# Altium PCB 400797.PcbDoc (part 5 of 8)
Units mm, origin at the board's own origin, x right, y up, seen from the top; angles counter-clockwise.
Board outline 155 x 63.5 mm, 4 copper layers (Top Layer, Mid-Layer 1, Mid-Layer 2, Bottom Layer), stack 1.514 mm thick; 333 components, 292 nets, 1555 pads, 2205 vias.
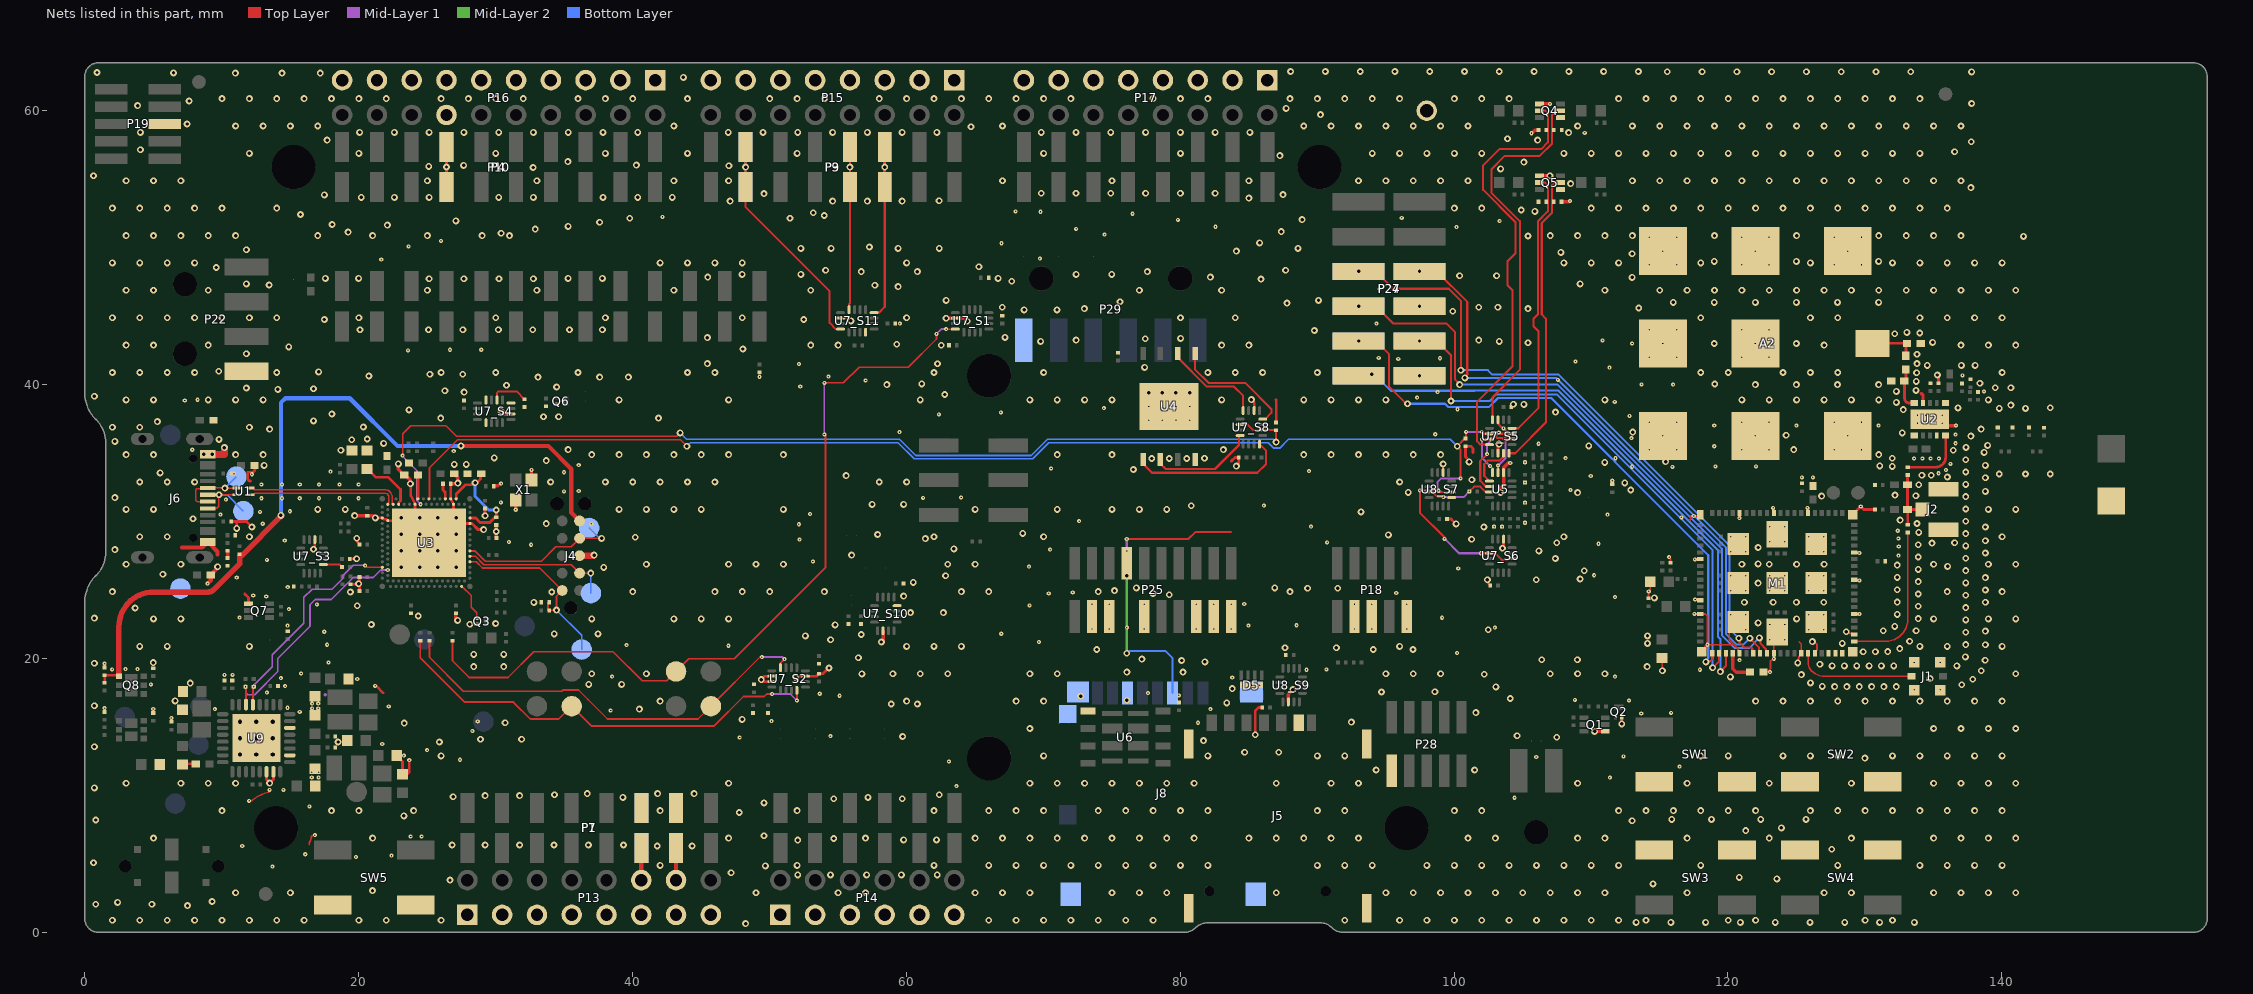
[diagram p5: the nets of this part, all layers, seen from the top]

## Via types
v1: diameter 0.5, hole 0.25, Top Layer to Bottom Layer, tented both sides, 1614 vias
v2: diameter 0.3, hole 0.1, Top Layer to Mid-Layer 1, tented top, 485 vias
v3: diameter 0.3, hole 0.1, Top Layer to Mid-Layer 1, tented both sides, 97 vias
v4: diameter 0.61, hole 0.305, Top Layer to Bottom Layer, tented both sides, 9 vias

## Nets (pads, with @x,y where several pads share a name; then routed paths per layer and width w, separated by ;. In a path a pad name is that pad's centre, name@x,y a point inside that pad or via, vN(x,y) a via of type N, cw(c..) or ccw(c..) an arc to the next point about the centre after c; other vN are vias at no path point) (continued)
COM.CH1_S11: P3.3 P9.3 U7_S11.16 | length 16.1
  Top Layer w0.15: U7_S11.16@57.643,45.25 58,45.25 58.42,45.67 P3.3@58.42,54.416 P3.3@58.42,57.346
  Bottom Layer w0.15: P9.3@58.42,53.824 P9.3@58.42,54.416 v1(58.42,55.881) P9.3@58.42,57.346
COM.CH2_S2: R16.2 TP10.1 U7_S2.4 | length 31.8
  Top Layer w0.125: R16.2@25.175,21.299 25.175,20.088 27.651,17.613 34.83,17.613 34.915,17.698 36.052,17.698 36.748,17.002 36.748,16.999 38.174,15.573 44.782,15.573 TP10.1@45.72,16.51 49.31,20.1 v2(49.45,20.1)
  Top Layer w0.15: U7_S2.4@50.8,19.325 50.8,19.65 v2(51.1,19.95)
  Mid-Layer 1 w0.15: v2(49.45,20.1) 50.95,20.1 v2(51.1,19.95)
COM.CH2_S11: P3.4 P9.4 U7_S11.4 | length 15.4
  Top Layer w0.15: U7_S11.4@55.818,45.475 55.818,45.875 55.881,45.938 P3.4@55.88,54.416 P3.4@55.88,57.346
  Bottom Layer w0.15: P9.4@55.88,53.824 P9.4@55.88,54.416 v1(55.88,55.881) P9.4@55.88,57.346
COM.CH3_S1: R12.2 TP7.1 U7_S1.8 | length 59.3
  Top Layer w0.125: R12.2@26.85,21.299 26.85,19.827 28.065,18.613 30.903,18.613 32.778,20.488 38.573,20.488 40.698,18.363 42.492,18.363 TP7.1@43.18,19.05 44.118,19.988 47.423,19.988 54.1,26.664 54.1,36.263 v2(54.013,36.35) ; v2(54.013,40.125) 55.4,40.125 56.55,41.275 60.15,41.275 62.2,43.325 v2(62.2,43.7) ; v2(62.9,44.052) 62.902,44.05 U7_S1.8@63.575,44.05
  Mid-Layer 1 w0.125: v2(54.013,36.35) v2(54.013,40.125) ; v2@62.175,43.675 v2(62.2,43.7) 62.552,44.052 v2(62.9,44.052)
COM.CH3_S4: U7_S4.8
COM.CH3_S11: P3.7 P9.7 U7_S11.8 | length 19.9
  Top Layer w0.15: P3.7@48.26,57.346 48.26,52.962 54.393,46.829 54.393,44.504 54.846,44.05 U7_S11.8@55.193,44.05
  Bottom Layer w0.15: P9.7@48.26,53.849 P9.7@48.26,54.416 P9.7@48.26,57.346
  other v1: 48.26,55.881
COM.CH4_S2: R15.2 TP6.1 U7_S2.12 | length 33.5
  Top Layer w0.125: R15.2@24.5,21.299 24.5,20.056 27.744,16.813 31.302,16.813 32.542,15.573 34.622,15.573 TP6.1@35.56,16.51 36.998,15.073 45.962,15.073 48.107,17.218 49.621,17.218 49.804,17.4 v2(50.2,17.4)
  Top Layer w0.15: v2(52,16.925) U7_S2.12@52,17.675
  Mid-Layer 1 w0.125: v2(50.2,17.4) 51.525,17.4 v2(52,16.925)
COM.CH4_S4: U7_S4.12
COM.CH4_S10: U7_S10.12
COM.CH4_S11: U7_S11.12
D:J6_N: J6.A7 J6.B7 TP19.1 U1.2 | length 6
  Top Layer w0.1: J6.A7@8.985,31.455 8.245,31.455 cw(c8.245,31.6) 8.1,31.6 8.1,32.3 cw(c8.2,32.3) 8.2,32.4 8.93,32.4 ccw(c8.93,32.455) J6.B7@8.985,32.455 10.145,32.455 10.2,32.4 v1@10.234,32.434 ; v1(10.232,32.436) v1@10.234,32.434 ; U1.2@11.1,32.45 11.093,32.443 10.267,32.443 10.255,32.455 v1@10.234,32.434
  Bottom Layer w0.1: v1@10.234,32.436 v1(10.232,32.436) TP19.1@11.074,33.276 TP19.1@11.074,33.276
D:J6_P: J6.A6 J6.B6 TP20.1 U1.3 | length 6.1
  Top Layer w0.1: J6.B6@8.985,30.955 9.655,30.955 9.8,31.1 v1(9.8,31.95) ; J6.A6@8.985,31.955 8.99,31.95 v1(9.8,31.95) ; U1.3@11.1,31.95 v1(9.8,31.95)
  Bottom Layer w0.1: v1(9.8,31.95) 10.393,31.95 TP20.1@11.582,30.76
D_N: U1.7 U3.B4 | length 11.3
  Top Layer w0.1: U1.7@12.1,32.45 12.3,32.45 12.35,32.4 12.35,32.384 12.409,32.325 21.9,32.325 cw(c21.9,31.775) 22.45,31.775 22.45,31.3 22.491,31.259 U3.B4@22.525,31.259
D_P: U1.6 U3.B2 | length 10.9
  Top Layer w0.1: U1.6@12.1,31.95 12.3,31.95 12.35,32 12.35,32.016 12.409,32.075 21.9,32.075 cw(c21.9,31.775) 22.2,31.775 22.2,31.3 22.159,31.259 U3.B2@22.125,31.259 U3.B2@22.12,31.259
DBG_CMD: J8.3 P25.8 SB11.1 | length 20.5
  Top Layer w0.15: v2(76.095,28.72) 80.595,28.72 81.125,29.25 SB11.1@83.65,29.25 83.688,29.25
  Mid-Layer 1 w0.15: v2(76.095,27.85) v2(76.095,28.72)
  Mid-Layer 2 w0.15: v1(76.095,20.375) v1(76.095,26.05)
  Bottom Layer w0.15: v1(76.095,20.375) 76.27,20.55 78.9,20.55 79.45,20 J8.3@79.45,17.47
DEC0: C6.1 M1.24 | length 2.2
  Top Layer w0.254: M1.24@120.35,20.375 120.35,19.25 120.6,19 C6.1@121.35,19
DECA: C40.2 U3.A13 | length 1.9
  Top Layer w0.225: U3.A13@24.325,31.659 C40.2@24.325,33.389 C40.2@24.325,33.564
DECN: C39.1 U3.A23 | length 1.2
  Top Layer w0.2: C39.1@26.159,32.759 26.159,32.3 26.325,32.134 U3.A23@26.325,31.659
DECR: C29.2 C30.1 U3.A27 U3.G31 | length 8.6
  Top Layer w0.2: U3.A27@27.125,31.659 27.125,32.003 27.806,32.684 28.35,32.684 v1(28.5,32.834) ; U3.G31@28.125,30.259 28.55,30.259 28.875,29.934 29.575,29.934 30.046,30.405 v1(30.046,30.843) ; v1@28.55,32.759 28.9,33.109 C29.2@28.9,33.509
  Bottom Layer w0.2: v1(28.5,32.834) 28.5,31.846 29.504,30.843 v1(30.046,30.843)
DECUSB: C38.1 U3.B6 | length 4.2
  Top Layer w0.187: C38.1@20.625,33.834 20.655,33.834 21.246,33.243 22.158,33.243 23.056,32.345 23.056,31.522 22.932,31.398 22.932,31.266 U3.B6@22.925,31.259 ; C38.1@20.925,33.834 C38.1@20.925,33.839
EXT_MEM_C\S\: U4.1 U7_S8.16 | length 11.5
  Top Layer w0.15: U4.1@77.282,34.53 77.282,34.218 77.939,33.561 85.636,33.561 86.273,34.198 86.273,35.177 U7_S8.16@85.8,35.65
EXT_MEM_CTRL: R38.2 U3.B14 U7_S8.2 U7_S8.10 | length 75.1
  Top Layer w0.125: v2(23.212,34.809) 23.212,36.4 23.812,37 26.375,37 27.15,36.225 43.225,36.225 v1(43.475,36.475)
  Top Layer w0.15: U7_S8.10@84.375,37.075 84.925,37.075 85.325,36.675 U7_S8.2@86.025,36.675 86.989,36.675 R38.2@87.003,36.661 87.003,35.803 v1(87,35.8)
  Mid-Layer 1 w0.125: v2(23.212,34.809) 23.212,34.747 24.262,33.697 24.262,31.522 v2(24.525,31.259)
  Bottom Layer w0.125: v1(43.475,36.475) 43.942,36.009 59.495,36.009 60.679,34.825 69.121,34.825 70.305,36.009 86.792,36.009 v1(87,35.8)
EXT_MEM_MISO: U4.2 U7_S8.12 | length 7.7
  Top Layer w0.15: U4.2@78.552,34.53 78.552,34.223 78.939,33.836 82.536,33.836 84.29,35.59 84.29,36.275 U7_S8.12@84.375,36.275
EXT_MEM_MOSI: U4.5 U7_S8.4 | length 9
  Top Layer w0.15: U4.5@81.092,42.27 81.092,41.096 82.064,40.125 84.745,40.125 86.65,38.22 86.65,37.93 86.195,37.475 U7_S8.4@86.025,37.475
EXT_MEM_SCK: U4.6 U7_S8.8 | length 7.3
  Top Layer w0.15: U4.6@79.822,42.27 79.822,41.978 81.95,39.85 83.925,39.85 84.6,39.175 U7_S8.8@84.6,38.1
FB2:VBUS: C51.2 FB2.2 J4.5 Q8.1 R76.1 R77.1 | length 56.9
  Top Layer w0.2: R77.1@1.45,18.235 R76.1@1.45,18.765 2.43,18.765 Q8.1@2.495,18.7
  Top Layer w0.3: v1(27.475,35.525) 33.85,35.525 35.525,33.85 35.525,30.65 J4.5@36.135,30.04
  Top Layer w0.4: Q8.1@2.495,18.7 2.495,22.31 cw(c5.035,22.31) 5.035,24.85 9.001,24.85 ccw(c9.001,25.45) 9.426,25.026 11.3,26.9 11.3,27.45 11.4,27.55 11.5,27.55 14.306,30.356 14.306,30.431 v1(14.325,30.45)
  Bottom Layer w0.3: v1(14.325,30.45) 14.325,38.675 14.65,39 19.35,39 22.825,35.525 v1(27.475,35.525)
GND: A1.2 A2.2 C1.2 C2.2 C3.2 C4.2 C5.2 C6.2 C7.2 C8.1 C9.1 C10.2 C11.1 C14.1 C15.1 C16.1 C17.1 C18.2 C19.1 C21.1 C22.1 C23.1 C24.1 C25.1 C26.2 C27.1 C28.2 C29.1 C30.2 C31.1 C32.1 C33.1 C34.2 C35.1 C36.1 C37.2 C38.2 C39.2 C40.1 C41.1 C42.1 C43.1 C44.2 C45.1 C46.1 C47.1 C48.2 C49.1 C50.1 C51.1 C52_S1.2 C52_S2.2 C52_S3.2 C52_S4.2 C52_S5.2 C52_S6.2 C52_S8.2 C52_S10.2 C52_S11.2 C53_S7.2 C53_S9.2 C54.1 C55.1 C56.1 C57.1 C58.1 C59.1 C60.1 C61.2 C62.2 C63.2 C64.1 C65.1 C66.1 C67.1 C68.1 C69.1 C70.1 C71.1 C72.1 D5.9 J1.2 J2.2 J4.3 J5.0 J5.C5 J6.A1 J6.A12 J8.0 J8.6 J8.9 L2.1 L5.2 M1.1 M1.7 M1.13 M1.15 M1.20 M1.25 M1.30 M1.34 M1.36 M1.38 M1.39 M1.40 M1.41 M1.43 M1.46 M1.51 M1.55 M1.60 M1.66 M1.71 M1.76 M1.105 M1.106 M1.107 M1.108 M1.109 M1.110 M1.111 M1.112 M1.113 P1.6 P1.7 P4.7 P7.6 P7.7 P10.7 P13.1 P13.3 P13.5 P13.7 P13.9 P13.11 P13.12 P13.13 P13.14 P13.15 P14.1 P14.3 P14.5 P14.7 P14.9 P14.11 P15.1 P15.3 P15.5 P15.7 P15.9 P15.11 P15.13 P15.15 P16.1 P16.3 P16.5 P16.7 P16.9 P16.11 P16.13 P16.14 P16.15 P16.17 P16.19 P17.1 P17.3 P17.5 P17.7 P17.9 P17.11 P17.13 P17.15 P18.3 P18.5 P18.9 P19.5 P22.4 P24.8 P24.12 P25.3 P25.5 P25.9 P25.15 P25.17 P25.19 P27.8 P27.12 P28.1 P29.1 Q1.1 Q2.2 Q3.2 Q4.1 Q4.4 Q5.1 Q5.4 Q6.2 Q7.1 R3.1 R7.1 R13.2 R14.1 R17.2 R18.1 R24.1 R31.2 R32.1 R36.2 R37.2 R38.1 R43.1 R44.1 R45.1 R46.1 R47.1 R59.1 R65.1 R67.2 R68.1 R70.1 R71.1 R72.2 R73.1 R74.1 R76.2 R78.1 R80.2 R81.2 R85.2 R86.2 SB19.1 SW1.1 SW2.1 SW3.1 SW4.1 SW5.1 TP18.1 TP24.1 U1.5 U1.8 U2.1 U2.4 U2.6 U2.9 U2.11 U3.104 U3.A25 U3.B12 U3.B26 U3.G1 U3.H2 U3.J31 U4.4 U4.9 U5.6 U6.1 U7_S1.6 U7_S2.6 U7_S2.7 U7_S2.15 U7_S3.6 U7_S4.6 U7_S5.6 U7_S6.6 U7_S8.6 U7_S10.6 U7_S11.6 U8_S7.6 U8_S9.6 U9.2 U9.6 U9.30 U9.31 U9.33 X1.2 X1.4 | length 111.2
  Top Layer w0.125: v2(12,9.6) 12.14,9.6 ccw(c12.14,9.725) 12.221,9.63 cw(c13.97,7.621) 13.4,10.223 ccw(c13.373,10.345) 13.497,10.334 ccw(c12.7,10.4) v2(13.5,10.4) ; 16.4,6.4 16.4,6.504 cw(c16.525,6.503) 16.41,6.553 ccw(c13.97,7.621) 16.555,6.976 cw(c16.676,6.945) 16.618,7.056 cw(c16.8,6.7) v2(16.8,7.1) ; C1.2@114.19,24.385 114.205,24.399 114.205,24.883 v3(114.219,24.898) 114.219,24.945 114.325,25.051 C7.2@114.325,25.6 ; C3.2@115.2,19.95 115.2,19.112 v1(115.213,19.1) ; v3(115.705,27.4) 115.705,27.352 115.8,27.257 C10.2@115.8,26.985 ; 117.2,30.1 117.3,30.2 117.3,30.4 v3(117.5,30.4) 117.875,30.4 M1.1@117.975,30.5 ; v2(117.55,23.25) M1.15@117.975,23.25 118.35,23.25 118.5,23.1 v3(118.5,21) 120.43,21 ; M1.107@120.75,22.65 120.65,22.65 120.1,22.1 120.1,21.33 120.43,21 ; M1.25@120.85,20.375 120.763,20.462 120.763,20.668 120.43,21 ; C6.2@122.85,19 123.114,19.264 123.114,19.814 123.336,20.036 123.336,20.361 M1.30@123.35,20.375 123.35,21.675 M1.108@123.6,21.925 ; v1(125.094,19.677) 125.158,19.74 125.158,20.042 125.188,20.072 125.188,20.139 125.261,20.212 125.263,20.212 125.35,20.3 M1.34@125.35,20.375 125.35,21.05 125.2,21.2 ; v1(126.17,21.233) 126.271,21.233 126.404,21.1 126.427,21.1 126.5,21.027 126.5,20.6 126.35,20.45 M1.36@126.35,20.375 ; v1(128.642,21.945) 128.744,21.945 128.87,21.818 129.157,21.818 M1.43@129.225,21.75
  Top Layer w0.15: P4.7@26.416,54.416 P4.7@26.416,57.346 ; U8_S7.6@99.2,33.575 v1(99.2,34.2)
  Top Layer w0.165: U3.A25@26.725,31.659 U3.B26@26.925,31.259
  Top Layer w0.187: v1(21.225,30.259) U3.G1@21.725,30.259 U3.G1@21.725,30.259 cw(c21.634,30.095) U3.G1@21.766,30.228 ; U3.G1@21.766,30.228 21.775,30.22 ccw(c21.907,30.352) 21.907,30.165 21.957,30.165 cw(c21.956,29.978) U3.H2@22.125,30.059 U3.104@22.825,30.059 ; v1@23.8,32.863 23.8,31.972 23.8,31.929 23.819,31.89 U3.B12@24.125,31.259
  Top Layer w0.2: R80.2@1.45,16.085 v2(1.448,16.368) ; R76.2@1.45,19.335 v2(1.448,19.618) ; R81.2@5,16.02 v2@5,16.303 ; v2(6.325,15.65) v2(6.325,15.65) C67.1@6.327,15.367 ; C54.1@7.127,12.247 7.18,12.3 C64.1@8.1,12.3 ; R70.1@10.685,30 11.1,30 ; R71.1@10.685,33.5 R71.1@10.714,33.529 ; v1(11.1,29.5) 11.1,30 ; 11.68,24.72 11.95,24.45 11.95,24.075 Q7.1@11.95,24 ; U1.8@12.1,32.95 cw(c12.1,33.15) 11.9,33.15 11.9,33.6 12.2,33.6 ccw(c12.2,33.825) 12.425,33.825 12.425,34.075 ccw(c12.4,34.075) C9.1@12.4,34.1 ; v1(12.2,29.6) 11.8,30 11.1,30 ; U9.30@13.275,11.725 13.275,11.167 13.5,10.942 v1(13.5,10.9) 13.775,11.175 U9.31@13.775,11.725 ; v1(16.7,27.975) 16.8,28.075 U7_S3.6@16.8,28.675 ; R24.1@19.36,27.275 v1(19.85,27.275) ; R65.1@19.4,25.415 v1@19.956,25.415 ; v1(20,25.459) 20.065,25.394 R31.2@20.065,24.925 ; v1@20.065,25.524 C26.2@20.065,25.959 ; v2(21.2,18) 21.219,17.981 21.294,17.981 21.787,17.487 ; C69.1@22.777,12.897 22.777,12.872 23.052,12.597 23.076,12.597 23.194,12.48 C70.1@23.194,11.549 23.245,11.6 23.583,11.6 23.7,11.717 v2@23.7,12.6 ; U3.A25@26.725,31.659 C39.2@26.725,32.755 ; v1@28.075,22.5 v1(28.125,22.5) Q3.2@28.625,22.5 ; U7_S2.7@50.175,18.3 49.55,18.3 v1(49.4,18.45) 49.65,18.7 U7_S2.6@50.175,18.7 ; v1(51.925,18.6) 52.025,18.7 U7_S2.15@52.625,18.7 53.44,18.7 C52_S2.2@53.6,18.86 ; C52_S2.2@53.625,18.885 53.91,18.885 54.15,19.125 ; U7_S11.6@55.193,44.85 55.748,44.85 v1(55.948,44.65) ; 83.725,34.4 83.996,34.671 C52_S8.2@84.268,34.671 84.268,34.218 v1(84.1,34.05) ; v1(85.2,38.9) 85.4,38.7 U7_S8.6@85.4,38.1 ; v1(85.475,14.43) 85.475,16.175 85.725,16.425 C48.2@85.99,16.425 ; 87,38.883 87.003,38.881 R38.1@87.003,37.231 ; C53_S7.2@99.482,30.192 99.783,30.192 v1(100.15,29.825) ; 100.9,34.65 100.825,34.725 R47.1@100.825,35.49 101.236,35.49 101.388,35.338 101.388,35.038 ; v1(102.429,25.744) 102.486,25.686 102.486,25.501 102.638,25.349 C52_S6.2@102.638,25.334 ; U7_S5.6@103.21,34.984 103.21,35.575 v1(103.285,35.65) ; v1(103.535,28.043) 103.61,28.118 U7_S6.6@103.61,28.709 ; R46.1@106.16,53.35 R46.1@106.195,53.315 ; v1(112.24,15.221) Q2.2@112.24,15.75 ; v3(117.588,27.237) 117.595,27.243 117.968,27.243 M1.7@117.975,27.25 ; v3(117.6,24.3) 117.619,24.281 117.944,24.281 M1.13@117.975,24.25 ; M1.20@118.1,20.5 118.35,20.75 118.35,20.833 118.5,20.983 v3(118.5,21) ; v3(120.838,30.249) 120.844,30.255 120.844,30.619 M1.76@120.85,30.625 ; v3(123.3,31) 123.35,30.95 M1.71@123.35,30.625 ; v3(125.8,31) 125.85,30.95 M1.66@125.85,30.625 ; M1.60@129.1,30.5 v3(129.7,31.1) 129.92,30.88 C19.1@130.745,30.88 ; M1.46@129.225,23.25 v3(129.605,23.249) ; M1.51@129.225,25.75 129.256,25.719 129.581,25.719 v3(129.6,25.7) ; M1.55@129.225,27.75 129.55,27.75 v3(129.6,27.7)
  Top Layer w0.225: v1(19.864,28.779) 19.917,28.726 19.917,28.497 20.065,28.349 C25.1@20.065,28.334 ; U3.104@24.125,29.859 U3.B12@24.125,31.259 ; U3.B26@26.925,31.259 26.925,29.859 U3.J31@28.125,29.859 28.275,29.859 28.725,29.409 v1(29.125,29.409) ; v1@29.225,30.426 C33.1@29.225,30.949 ; C34.2@29.86,32.575 29.86,32.589 29.882,32.612 30.176,32.612 30.331,32.766 v2(30.405,32.766) ; C30.2@30.05,29.749 v1(30.05,29.272) 30.05,28.794 C32.1@30.06,28.784
  Top Layer w0.25: C51.1@10.425,27.335 C50.1@10.425,27.865 ; v1(19.708,30.434) 19.713,30.429 20.6,30.429 C24.1@20.6,30.434 ; C24.1@20.625,30.424 20.65,30.414 20.995,30.414 cw(c20.994,30.164) v1(21.225,30.259) ; v1(22.9,34.209) 22.9,33.814 23.15,33.564 23.15,33.514 23.275,33.389 C40.1@23.325,33.389 ; C40.1@23.325,33.484 23.75,33.059 v1@23.75,32.909 ; C39.2@26.725,32.755 v1@27.196,32.755 ; C28.2@26.975,33.484 27.25,33.209 v1(27.25,32.809) ; C31.1@27.1,23.299 27.1,22.909 v1(27.229,22.779) ; v2(31.475,30.86) X1.4@31.475,31.588 ; X1.2@32.625,33.038 v2(32.625,33.767) ; R45.1@107.848,53.35 108.38,53.35 108.438,53.407 v2(108.465,53.407) ; v1(110.265,14.675) Q1.1@111.04,14.675 ; 134.125,39.347 134.247,39.225 U2.4@134.247,38.653 ; U2.11@134.747,37.465 v2(135.047,37.165) 135.204,37.008 v2(136.652,37.008) ; v1(135.3,40.697) 135.375,40.622 C15.1@135.375,40.107
  Top Layer w0.254: v1(30.4,38.05) 30.6,37.85 U7_S4.6@31.125,37.85 ; v1(58.175,21.2) 58.3,21.325 U7_S10.6@58.3,22.025 ; v1(62.9,44.848) 62.902,44.85 U7_S1.6@63.575,44.85 64.225,44.85 64.475,44.6 v1(64.45,44.625) ; U8_S9.6@87.9,16.825 87.9,17.4 v1(88.225,17.725) ; 103.4,32.475 103.61,32.685 U5.6@103.61,33.575 103.612,33.577 103.612,33.937 103.95,34.275 v2(104.1,34.275) ; R59.1@103.488,29.619 103.496,29.627 v2(103.511,29.627) ; v2(105.657,58.355) 105.88,58.577 106.163,58.577 106.171,58.585 R44.1@106.171,58.6 ; Q5.4@106.25,55.25 v1(107,55.25) ; Q4.4@106.25,60.5 v2(107,60.5)
  Top Layer w0.3: 7.1,28.1 8.58,28.1 J6.A12@8.985,28.505 9.7,27.79 9.7,27.6 ; v2(8.97,25.463) 9.2,25.693 C63.2@9.2,26.1 9.7,26.6 v1(9.7,26.7) ; P13.12@40.64,3.811 P1.6@40.64,6.156 ; P13.14@43.18,3.811 P1.7@43.18,6.156
  Top Layer w0.5: J6.A1@8.985,34.905 9.295,34.905 v1(9.3,34.9) 10.2,34.9 v1(10.2,35.4) ; J4.3@36.135,27.5 v1@37.15,27.5
  Mid-Layer 1 w0.2: v3@120.838,30.222 v3(120.838,30.249)
  Mid-Layer 1 w0.25: 17.568,17.343 17.575,17.35
  Bottom Layer w0.15: P10.7@26.416,54.416 P10.7@26.416,57.346
  other v1: 48.26,0.636 113.292,0.724 115.832,0.724 118.372,0.724 120.912,0.724 123.452,0.724 125.992,0.724 128.532,0.724 131.072,0.724 133.612,0.724 2.018,0.883 4.018,0.883 6.018,0.883 8.018,0.883 10.018,0.883 12.018,0.883 14.018,0.883 16.018,0.883 20.018,0.883 22.018,0.883 26.018,0.883 66.018,0.883 68.018,0.883 70.018,0.883 72.018,0.883 74.018,0.883 76.018,0.883 78.018,0.883 92.018,0.883 96.018,0.883 98.018,0.883 100.018,0.883 102.018,0.883 104.018,0.883 106.018,0.883 108.018,0.883 110.018,0.883 112.018,0.883 114.018,0.883 120.018,0.883 122.018,0.883 130.018,0.883 132.018,0.883 7.5,1.95 0.8,2.05 4.9,2.05 2.4,2.185 9.3,2.25 11.018,2.883 15.018,2.883 49.018,2.883 55.018,2.883 57.018,2.883 65.018,2.883 67.018,2.883 69.018,2.883 75.018,2.883 77.018,2.883 79.018,2.883 87.018,2.883 95.018,2.883 97.018,2.883 99.018,2.883 101.018,2.883 103.018,2.883 105.018,2.883 107.018,2.883 109.018,2.883 111.018,2.883 117.018,2.883 127.018,2.883 129.018,2.883 135.018,2.883 137.018,2.883 139.018,2.883 141.018,2.883 21.012,3.049 114.529,3.531 26.67,3.811 123.575,3.9 120.828,4.013 52.07,4.192 54.458,4.192 57.099,4.192 59.639,4.192 62.255,4.192 47.2,4.35 49.7,4.85 42.018,4.883 52.018,4.883 62.018,4.883 66.018,4.883 68.018,4.883 70.018,4.883 72.018,4.883 74.018,4.883 76.018,4.883 78.018,4.883 80.018,4.883 82.018,4.883 90.018,4.883 92.018,4.883 94.018,4.883 98.018,4.883 100.018,4.883 102.018,4.883 104.018,4.883 106.018,4.883 108.018,4.883 110.018,4.883 112.018,4.883 118.018,4.883 128.018,4.883 134.018,4.883 136.018,4.883 138.018,4.883 140.018,4.883 0.635,5.081 127.583,6.063 41.808,6.3 44.348,6.3 26.822,6.375 29.235,6.375 31.75,6.375 34.265,6.375 36.779,6.375 39.345,6.376 52.07,6.732 59.8,6.75 62.2,6.75 54.7,6.85 5.018,6.883 21.018,6.883 47.018,6.883 57.018,6.883 65.018,6.883 67.018,6.883 69.018,6.883 71.018,6.883 73.018,6.883 75.018,6.883 77.018,6.883 79.018,6.883 81.018,6.883 85.018,6.883 87.018,6.883 89.018,6.883 91.018,6.883 93.018,6.883 101.018,6.883 103.018,6.883 109.018,6.883 111.018,6.883 117.018,6.883 123.018,6.883 129.018,6.883 135.018,6.883 137.018,6.883 139.018,6.883 141.018,6.883 49.6,7.05 121.3,7.425 123.9,7.625 113,8.15 0.8,8.2 115.9,8.25 118.8,8.25 122.4,8.25 125.7,8.25 23.3,8.5 47.8,8.75 10.018,8.883 18.018,8.883 20.018,8.883 24.018,8.883 42.018,8.883 52.018,8.883 62.018,8.883 66.018,8.883 68.018,8.883 70.018,8.883 74.018,8.883 76.018,8.883 78.018,8.883 80.018,8.883 82.018,8.883 90.018,8.883 92.018,8.883 100.018,8.883 102.018,8.883 112.018,8.883 114.018,8.883 116.018,8.883 118.018,8.883 120.018,8.883 122.018,8.883 126.018,8.883 128.018,8.883 130.018,8.883 132.018,8.883 134.018,8.883 136.018,8.883 138.018,8.883 140.018,8.883 49.6,9.45 54.7,9.75 59.7,9.75 39.3,9.85 57.2,9.85 26.9,9.9 29.235,9.983 31.75,9.983 34.3,10.05 62.4,10.05 36.7,10.125 41.834,10.125 44.501,10.125 0.7,10.55 3.018,10.883 7.018,10.883 9.018,10.883 11.018,10.883 47.018,10.883 69.018,10.883 71.018,10.883 73.018,10.883 75.018,10.883 77.018,10.883 79.018,10.883 81.018,10.883 87.018,10.883 91.018,10.883 93.018,10.883 109.018,10.883 117.018,10.883 123.018,10.883 129.018,10.883 135.018,10.883 137.018,10.883 139.018,10.883 141.018,10.883 94.3,11.85 101.5,11.85 129.997,12.725 26.018,12.883 70.018,12.883 82.018,12.883 90.018,12.883 92.018,12.883 118.018,12.883 120.018,12.883 124.018,12.883 126.018,12.883 128.018,12.883 132.018,12.883 134.018,12.883 136.018,12.883 138.018,12.883 140.018,12.883 84.7,13.15 87.2,13.15 0.7,13.55 18.5,13.9 25.9,13.9 81.7,14 28.9,14.1 31.9,14.1 107.5,14.25 59.725,14.3 104.6,14.35 69.018,14.883 135.018,14.883 137.018,14.883 139.018,14.883 141.018,14.883 23.325,15.275 30.7,15.3 92.5,15.35 48,15.55 101.591,16.041 40.5,16.3 0.7,16.55 58.9,16.675 60.8,16.675 83.4,16.75 6.6,16.9 42.018,16.883 60.018,16.883 68.018,16.883 70.018,16.883 122.018,16.883 124.018,16.883 126.018,16.883 128.018,16.883 130.018,16.883 132.018,16.883 134.018,16.883 136.018,16.883 138.018,16.883 140.018,16.883 76.1,16.95 104.1,17.075 72.725,17.25 94.7,17.55 98.602,17.571 83.8,17.8 103.05,17.925 127.79,17.941 128.69,17.941 129.59,17.941 130.49,17.941 131.39,17.941 132.29,17.941 126.89,17.954 137.074,18.077 36.8,18.1 39.2,18.1 7.7,18.2 126.028,18.213 137.881,18.475 134.768,18.529 120.175,18.65 125.361,18.818 102.2,18.85 56.75,18.875 37.018,18.883 41.018,18.883 59.018,18.883 61.018,18.883 63.018,18.883 69.018,18.883 71.018,18.883 95.018,18.883 97.018,18.883 99.018,18.883 107.018,18.883 109.018,18.883 111.018,18.883 141.018,18.883 76.1,19 80.2,19 138.5,19.1 54.35,19.3 28.4,19.4 30.6,19.4 114.1,19.4 127.605,19.459 128.505,19.459 129.405,19.459 130.305,19.459 131.205,19.459 132.105,19.459 136.723,19.459 126.713,19.578 0.7,19.65 5,19.7 81.8,19.75 80.1,19.85 138.78,19.865 106.4,19.9 109,19.9 77.2,19.95 56.5,20.05 137.339,20.115 28.4,20.3 30.6,20.3 129.87,20.491 130.77,20.491 131.67,20.501 73.9,20.65 94.1,20.65 97,20.65 132.542,20.722 87.65,20.785 91.4,20.775 4.018,20.883 6.018,20.883 12.018,20.883 60.018,20.883 62.018,20.883 64.018,20.883 96.018,20.883 134.018,20.883 136.018,20.883 140.018,20.883 137.365,21.014 138.8,21 114.125,21.1 128.345,21.095 133.268,21.254 54.468,21.363 52.625,21.65 114.125,21.65 56.7,21.75 34.29,21.79 37.482,21.79 137.365,21.914 138.8,22 131.336,22.022 133.741,22.02 102.5,22.1 132.18,22.336 54.8,22.45 20.929,22.479 30,22.55 122.2,22.6 137.365,22.814 5.018,22.883 7.018,22.883 37.018,22.883 43.018,22.883 45.018,22.883 47.018,22.883 125.018,22.883 135.018,22.883 139.018,22.883 141.018,22.883 133.895,22.907 0.7,22.95 24.35,23.1 132.364,23.216 60.3,23.35 62.7,23.35 3.679,23.684 137.365,23.714 133.895,23.807 19.9,23.85 32.803,24.091 121.2,24.1 123.3,24.1 125,24.1 127,24.1 138.8,24.1 132.364,24.116 114.625,24.425 59.8,24.55 137.365,24.614 79.2,24.65 133.895,24.707 78,24.75 19.4,24.85 34.1,24.85 2.018,24.883 40.018,24.883 46.018,24.883 48.018,24.883 50.018,24.883 54.018,24.883 64.018,24.883 66.018,24.883 74.018,24.883 88.018,24.883 136.018,24.883 140.018,24.883 75.2,24.95 138.8,25 132.364,25.016 89.3,25.125 91.5,25.125 76.8,25.15 86.9,25.15 122.2,25.5 137.365,25.514 60.5,25.55 133.895,25.607 106,25.75 109.2,25.8 132.364,25.916 138.8,25.9 62.865,26.035 5.7,26.15 109.5,26.4 137.365,26.414 133.895,26.507 37.9,26.65 23.125,26.659 24.458,26.659 25.792,26.659 27.125,26.659 136.042,26.721 132.364,26.816 3.018,26.883 7.018,26.883 41.018,26.883 47.018,26.883 49.018,26.883 51.018,26.883 63.018,26.883 65.018,26.883 121.018,26.883 123.018,26.883 125.018,26.883 127.018,26.883 135.018,26.883 139.018,26.883 141.018,26.883 122.2,26.9 107.4,27.3 137.365,27.314 133.895,27.407 37.2,27.55 56,27.55 138.8,27.7 23.125,27.859 24.458,27.859 25.792,27.859 27.125,27.859 106.193,27.857 2.2,27.95 63.474,28.001 122.2,28.1 137.365,28.214 133.895,28.307 134.899,28.423 107.5,28.45 136.55,28.448 138.8,28.6 101.275,28.7 61.392,28.753 40.2,28.85 4.018,28.883 6.018,28.883 12.018,28.883 62.018,28.883 70.018,28.883 108.018,28.883 140.018,28.883 95.2,29.025 23.125,29.059 24.458,29.059 25.792,29.059 27.125,29.059 57.9,29.05 137.365,29.114 68.504,29.134 133.936,29.206 102.175,29.6 138.8,29.6 33.7,29.85 133.805,29.855 137.365,30.014 132.575,30.105 7.9,30.2 23.125,30.259 24.458,30.259 25.792,30.259 27.125,30.259 29.23,30.421 93.2,30.7 3.018,30.883 5.018,30.883 17.018,30.883 19.018,30.883 39.018,30.883 41.018,30.883 43.018,30.883 45.018,30.883 51.018,30.883 65.018,30.883 71.018,30.883 75.018,30.883 77.018,30.883 79.018,30.883 139.018,30.883 141.018,30.883 137.365,30.914 80.8,31.15 57.5,31.25 59.8,31.25 2.2,31.75 137.365,31.814 126.838,31.854 133.73,31.88 132.2,31.925 109.021,32.109 96.65,32.125 103.4,32.125 138.8,32.2 112.9,32.3 133.93,32.68 137.365,32.714 23.775,32.759 112.46,32.822 4.018,32.883 6.018,32.883 8.018,32.883 34.018,32.883 38.018,32.883 40.018,32.883 42.018,32.883 44.018,32.883 46.018,32.883 58.018,32.883 60.018,32.883 96.018,32.883 101.3,33.05 138.8,33.2 136.025,33.25 55.6,33.35 134.163,33.376 134.849,33.376 139.814,33.467 141.73,33.467 143.534,33.467 5.5,33.55 137.365,33.614 76.575,33.8 132,34.024 131.09,34.066 13.1,34.1 138.8,34.1 26.976,34.175 27.862,34.175 111,34.314 101.1,34.35 115.45,34.375 33.7,34.45 137.365,34.514 77.925,34.6 79.2,34.6 80.475,34.6 81.775,34.625 132,34.62 29.9,34.65 3.018,34.883 5.018,34.883 11.018,34.883 13.018,34.883 37.018,34.883 39.018,34.883 41.018,34.883 43.018,34.883 45.018,34.883 47.018,34.883 51.018,34.883 71.018,34.883 75.018,34.883 89.018,34.883 91.018,34.883 93.018,34.883 95.018,34.883 97.018,34.883 99.018,34.883 131.018,34.883 8.7,34.9 138.709,35.052 18.7,35.2 136.45,35.2 35.3,35.25 83.15,35.25 124.8,35.25 137.382,35.414 109.838,35.524 138.963,35.56 21.825,35.709 2.2,35.85 19.5,35.975 9.8,36 20.625,36.025 137.74,36.24 124.25,36.3 132.725,36.475 113.05,36.525 13.5,36.75 138.483,36.748 2.018,36.883 4.018,36.883 12.018,36.883 20.35,36.9 5.3,37.3 16.7,37.35 26,37.55 41.9,37.55 33.5,37.65 34.6,37.65 18.05,37.85 107.406,37.993 23.675,38.15 132.8,38.175 139.814,38.257 141.73,38.257 136.8,38.3 143.534,38.304 140.664,38.499 104.333,38.567 105.1,38.55 132.3,38.7 3.018,38.883 5.018,38.883 9.018,38.883 11.018,38.883 13.018,38.883 39.018,38.883 47.018,38.883 61.018,38.883 69.018,38.883 71.018,38.883 73.018,38.883 75.018,38.883 83.018,38.883 89.018,38.883 91.018,38.883 93.018,38.883 95.018,38.883 111.018,38.883 121.018,38.883 123.018,38.883 125.018,38.883 127.018,38.883 129.018,38.883 131.018,38.883 139.018,38.883 0.7,39.15 62.8,39.275 77.687,39.4 78.687,39.4 79.687,39.4 80.687,39.4 27.7,39.45 132.3,39.5 26.3,39.55 133.731,39.573 14.1,39.65 16.7,39.7 11.8,39.75 139.521,39.769 140.664,39.769 34.457,39.825 30.8,39.95 58.575,40 122,40 125,40 128,40 131,40 119.04,40.04 61.125,40.05 138.4,40.1 133.756,40.234 33.1,40.55 37.6,40.55 39.7,40.55 20.75,40.625 97.473,40.641 25.2,40.75 27.6,40.75 133.782,40.869 2.018,40.883 4.018,40.883 6.018,40.883 8.018,40.883 14.018,40.883 26.018,40.883 30.018,40.883 36.018,40.883 44.018,40.883 46.018,40.883 62.018,40.883 70.018,40.883 82.018,40.883 84.018,40.883 86.018,40.883 90.018,40.883 118.018,40.883 120.018,40.883 124.018,40.883 126.018,40.883 128.018,40.883 140.018,40.883 17.075,40.925 9.779,40.969 77.4,41.25 134.55,41.397 137.05,41.397 138.05,41.397 45.466,41.529 62.275,41.525 133.807,41.529 133.807,42.215 11.8,42.25 48.057,42.596 14.9,42.75 3.018,42.883 5.018,42.883 9.018,42.883 53.018,42.883 55.018,42.883 62.55,42.875 83.018,42.883 85.018,42.883 127.018,42.883 137.018,42.883 139.018,42.883 141.018,42.883 59.3,42.95 119,43 125,43 105.4,43.05 134.95,43.078 69.8,43.15 103.3,43.15 72.4,43.25 101.8,43.25 77.45,43.35 80.025,43.375 45.466,43.435 67.2,43.45 132.182,43.713 134.01,43.764 133.071,43.815 89.8,43.95 20.1,44 25.1,44 27.61,44 30.201,44 32.715,44 35.4,44 37.8,44 17.5,44.75 52.5,44.75 2.018,44.883 4.018,44.883 6.018,44.883 8.018,44.883 10.018,44.883 12.018,44.883 14.018,44.883 20.018,44.883 30.018,44.883 38.018,44.883 48.018,44.883 60.018,44.883 80.018,44.883 84.018,44.883 118.018,44.883 126.018,44.883 128.018,44.883 134.018,44.883 136.018,44.883 138.018,44.883 140.018,44.883 99.9,45.35 68.6,45.45 71,45.45 73,45.55 105.4,45.55 113.485,45.595 67,45.65 101.8,45.65 103.2,45.65 97.473,45.721 87.8,45.95 116,46 119,46 122,46 125,46 128,46 131,46 75.6,46.05 62.9,46.15 90.1,46.15 3.018,46.883 5.018,46.883 9.018,46.883 25.018,46.883 33.018,46.883 43.018,46.883 53.018,46.883 77.018,46.883 83.018,46.883 111.018,46.883 115.018,46.883 117.018,46.883 119.018,46.883 121.018,46.883 123.018,46.883 125.018,46.883 127.018,46.883 129.018,46.883 131.018,46.883 133.018,46.883 135.018,46.883 137.018,46.883 139.018,46.883 141.018,46.883 59.4,47.15 57.7,47.25 13.462,47.269 11.8,47.35 109.2,47.35 67.7,47.55 85.9,47.7 25.146,47.731 27.686,47.731 30.251,47.731 32.766,47.731 17.572,47.757 20,47.75 35.3,47.75 37.8,47.75 66.7,47.75 113,47.83 45.5,47.85 82.2,47.85 100.4,47.95 103.1,47.95 48,48.05 52.3,48.05 72.4,48.05 75,48.05 56.7,48.25 60.8,48.25 77.6,48.25 54.1,48.35 87.7,48.35 9.6,48.55 65.3,48.6 2.018,48.883 4.018,48.883 6.018,48.883 8.018,48.883 42.018,48.883 44.018,48.883 46.018,48.883 48.018,48.883 60.018,48.883 108.018,48.883 110.018,48.883 112.018,48.883 118.018,48.883 126.018,48.883 132.018,48.883 134.018,48.883 136.018,48.883 138.018,48.883 140.018,48.883 119,49 125,49 131,49 113,49.55 107.8,49.65 84.1,49.75 11.8,49.85 52.3,49.95 54.5,49.95 59.4,49.95 62.4,49.95 88.6,49.95 57.3,50.05 85.8,50.35 141.586,50.821 105.4,50.85 3.018,50.883 5.018,50.883 7.018,50.883 9.018,50.883 11.018,50.883 17.018,50.883 21.018,50.883 25.018,50.883 29.018,50.883 31.018,50.883 107.018,50.883 109.018,50.883 111.018,50.883 113.018,50.883 119.018,50.883 125.018,50.883 131.018,50.883 133.018,50.883 135.018,50.883 137.018,50.883 30.4,51.05 19.228,51.13 87.374,51.176 32.9,51.35 35.3,51.55 22.1,51.65 18.059,51.689 37.6,51.85 27.1,51.95 88.9,52.05 39.8,52.15 51.5,52.15 54,52.35 15.756,52.419 53.2,52.55 105.9,52.65 104.9,52.75 2.018,52.883 4.018,52.883 6.018,52.883 8.018,52.883 10.018,52.883 14.018,52.883 100.018,52.883 102.018,52.883 110.018,52.883 112.018,52.883 114.018,52.883 116.018,52.883 118.018,52.883 120.018,52.883 122.018,52.883 124.018,52.883 126.018,52.883 128.018,52.883 130.018,52.883 132.018,52.883 134.018,52.883 136.018,52.883 47.124,53.395 54.61,53.395 57.15,53.395 59.69,53.395 62.391,53.425 85.014,53.619 20.193,53.667 22.606,53.667 25.146,53.667 30.226,53.667 32.766,53.667 37.846,53.667 40.386,53.667 42.901,53.667 17.5,53.85 87.503,53.873 49.6,53.95 69.85,53.976 72.39,53.976 74.93,53.976 77.47,53.976 80.01,53.976 82.55,53.976 137.744,54.381 108.512,54.682 3.018,54.883 5.018,54.883 7.018,54.883 25.018,54.883 33.018,54.883 43.018,54.883 47.018,54.883 67.018,54.883 75.018,54.883 85.018,54.883 93.018,54.883 95.018,54.883 97.018,54.883 99.018,54.883 101.018,54.883 113.018,54.883 115.018,54.883 117.018,54.883 119.018,54.883 121.018,54.883 123.018,54.883 125.018,54.883 127.018,54.883 129.018,54.883 131.018,54.883 133.018,54.883 135.018,54.883 137.018,54.883 0.635,55.246 103.4,55.75 32.741,55.855 26.416,55.891 25.121,55.931 47.041,55.982 27.661,56.007 40.284,56.032 105.1,56.25 35.281,56.286 87.274,56.718 12.018,56.883 20.018,56.883 30.018,56.883 38.018,56.883 44.018,56.883 52.018,56.883 70.018,56.883 80.018,56.883 94.018,56.883 96.018,56.883 98.018,56.883 100.018,56.883 102.018,56.883 108.018,56.883 110.018,56.883 112.018,56.883 114.018,56.883 116.018,56.883 118.018,56.883 120.018,56.883 122.018,56.883 124.018,56.883 126.018,56.883 128.018,56.883 130.018,56.883 132.018,56.883 134.018,56.883 136.55,57 4.064,57.151 137.77,57.734 17.7,57.85 106.1,57.85 103.9,57.95 108.367,58.4 4.064,58.421 20.066,58.421 22.606,58.421 25.146,58.421 27.686,58.421 30.226,58.421 32.766,58.421 35.306,58.421 37.846,58.421 40.386,58.421 46.99,58.421 49.53,58.421 52.07,58.421 54.61,58.421 57.15,58.421 59.69,58.421 62.23,58.421 69.85,58.421 72.39,58.421 74.93,58.421 77.47,58.421 80.01,58.421 82.55,58.421 85.09,58.421 64.719,58.826 11.018,58.883 13.018,58.883 15.018,58.883 17.018,58.883 43.018,58.883 67.018,58.883 89.018,58.883 91.018,58.883 93.018,58.883 95.018,58.883 97.018,58.883 99.018,58.883 101.018,58.883 109.018,58.883 113.018,58.883 115.018,58.883 117.018,58.883 119.018,58.883 121.018,58.883 123.018,58.883 125.018,58.883 127.018,58.883 129.018,58.883 131.018,58.883 133.018,58.883 135.018,58.883 137.018,58.883 7.467,59.031 90.246,59.715 87.732,60.173 3.861,60.377 137.795,60.528 7.62,60.707 10.018,60.883 12.018,60.883 14.018,60.883 16.018,60.883 18.018,60.883 20.018,60.883 22.018,60.883 26.018,60.883 28.018,60.883 30.018,60.883 32.018,60.883 36.018,60.883 38.018,60.883 40.018,60.883 44.018,60.883 50.018,60.883 52.018,60.883 54.018,60.883 58.018,60.883 60.018,60.883 62.018,60.883 64.018,60.883 66.018,60.883 68.018,60.883 70.018,60.883 72.018,60.883 78.018,60.883 80.018,60.883 82.018,60.883 88.018,60.883 90.018,60.883 92.018,60.883 94.018,60.883 96.018,60.883 100.018,60.883 102.018,60.883 104.018,60.883 112.018,60.883 114.018,60.883 116.018,60.883 118.018,60.883 120.018,60.883 122.018,60.883 124.018,60.883 126.018,60.883 128.018,60.883 130.018,60.883 132.018,60.883 134.018,60.883 43.713,62.434 6.477,62.764 11,62.75 14.4,62.75 17.2,62.75 0.889,62.79 115.57,62.841 118.11,62.841 120.65,62.841 123.19,62.841 125.73,62.841 128.27,62.841 130.81,62.841 133.35,62.841 137.795,62.84 88.061,62.864 90.601,62.864 93.141,62.864 95.681,62.864 98.221,62.864 100.761,62.864 103.301,62.864 105.841,62.864 108.381,62.864 110.921,62.864 113.461,62.864
  other v2: 13.7,4.8 19.8,5.5 22.4,5.6 16.1,5.7 11.5,6.3 23.8,7 24.6,7 16.4,9.2 14.5,10.4 63.65,10.675 16.575,11.31 17.075,11.31 16.575,11.7 17.075,11.7 63.1,12.475 23.697,12.573 27.4,12.6 23.3,12.9 25,13.3 21.72,13.755 47.825,14.225 54.45,14.325 28.3,14.7 81.3,15.3 28.7,15.4 50.15,15.425 15.7,16.1 38.4,16.2 4.998,16.303 9.5,16.3 82.2,16.3 16.6,16.35 17.05,16.35 14.8,16.4 22.2,16.5 16.6,16.7 17.05,16.7 55.125,17.275 79.9,17.3 53.675,17.425 77.65,17.47 13.3,17.5 133.6,17.7 135.5,17.7 14.631,17.974 84.6,18.05 85.2,18.05 85.8,18.05 4.822,18.103 19.9,18.5 14.316,18.558 83.8,18.6 38.514,18.672 10.2,18.8 10.8,18.8 15.8,18.9 2,19.2 2.974,19.216 3.847,19.218 17.8,19.7 133.6,19.7 135.5,19.7 100.225,20.4 47,20.925 39.575,20.975 17.7,21 69.675,21.2 66.925,21.8 17.491,21.95 73.555,22.15 74.825,22.15 77.365,22.15 81.175,22.15 82.445,22.15 83.715,22.15 92.73,22.15 94,22.15 96.54,22.15 76.1,22.25 102.975,22.25 14.8,22.4 84.975,22.4 88.5,22.425 11.306,22.983 99.125,22.975 14.9,23.6 69,23.875 16.953,23.947 73.555,23.95 74.825,23.95 77.365,23.95 81.175,23.95 82.445,23.95 83.715,23.95 92.73,23.95 94,23.95 96.54,23.95 13.252,24.528 12.3,24.6 70.4,24.75 95.775,24.775 72.15,24.825 14.824,25.211 11.1,25.9 110.225,26.075 100.3,26.575 68.953,26.708 53.175,27.075 13.3,27.2 70.5,27.95 32.6,28.3 110.55,28.375 30.975,28.5 14.6,28.6 52.2,28.675 102.927,29.627 52.15,29.8 37,29.825 12.995,29.838 105.174,29.906 72.612,30.027 9.9,30.5 111.2,30.5 52.975,30.55 12.8,30.7 14.975,30.75 105.174,31.379 30.387,31.395 10.3,31.6 12.9,31.7 14.4,31.7 15.7,31.7 17.1,31.7 18.6,31.7 20,31.7 61.225,31.725 64,31.75 35,32.2 36.075,32.225 108.5,32.3 12.9,32.7 14.4,32.7 15.7,32.7 17.1,32.7 18.6,32.7 20,32.7 105.174,32.852 111.55,32.975 125.4,33.225 126.2,33.225 109.982,33.325 12.2,33.45 10.9,33.5 135.382,33.528 35,33.6 17.945,33.638 135.916,33.759 115.937,33.987 113,34 119.077,34.03 122.047,34.027 36.074,34.119 136.246,34.214 105.174,34.326 133.6,34.6 134.2,34.6 134.8,34.6 135.4,34.6 108.15,34.625 111.785,34.62 26.945,35.138 7.845,35.238 114.25,35.25 116.25,35.25 121,35.25 123,35.25 127.75,35.25 129.75,35.25 119,35.5 106.175,35.675 136.627,35.712 112.947,36.092 115.25,36.25 122,36.25 128.75,36.25 136.627,36.347 98.625,36.375 119,37 125,37 131,37 133.847,37.165 134.447,37.165 135.647,37.165 114.25,37.25 116.25,37.25 121,37.25 123,37.25 127.75,37.25 129.75,37.25 77.687,37.4 78.687,37.4 79.687,37.4 80.687,37.4 112.81,37.714 133.847,37.765 134.447,37.765 135.047,37.765 135.647,37.765 100.25,38.2 74.422,38.278 77.687,38.4 78.687,38.4 79.687,38.4 80.687,38.4 111.735,38.735 7.303,38.837 8.242,38.888 97.3,39.05 98.8,39.45 138.7,39.497 113.699,40.015 116,40 107.58,40.343 137.125,40.672 111.345,41.241 108.864,41.681 95.925,41.875 98.975,41.925 94.5,41.95 114.25,42 116.25,42 121,42 123,42 23.6,42.5 26.67,42.546 28.956,42.546 113,43 115.25,43 122,43 110.846,43.231 114.25,44 116.25,44 121,44 123,44 94.325,44.45 94.55,46.975 114.25,48.75 116.25,48.75 121,48.75 123,48.75 127.75,48.75 129.75,48.75 21.65,49.125 69.75,49.2 115.25,49.75 122,49.75 128.75,49.75 23.647,50.089 66.95,50.325 26.01,50.495 114.25,50.75 116.25,50.75 121,50.75 123,50.75 127.75,50.75 129.75,50.75 74.475,50.95 72.4,51.375 100.175,51.5 82.575,51.525 103.325,51.95 79.825,52.025 96.175,52.175 42.189,52.248 76.525,52.475 69.8,52.625 67.975,52.65 109.544,58.38
  other v3: 104.425,9.825 111.375,11.3 116.475,12.1 106,12.8 112.375,12.85 113.67,15.975 115.85,16.025 112.775,16.925 108.825,16.975 111.75,18.675 123.075,19 89.225,19.175 117.95,19.175 90.675,19.2 120.85,19.875 123.35,19.975 123.05,21.375 124.15,21.375 121.3,22.1 125.9,22.1 127,22.1 123.05,22.475 124.15,22.475 120.2,23.2 121.3,23.2 125.9,23.2 127,23.2 84.675,23.975 111.75,24.475 120.2,24.95 121.3,24.95 123.05,24.95 124.15,24.95 125.9,24.95 127,24.95 120.2,26.05 121.3,26.05 123.05,26.05 124.15,26.05 125.9,26.05 127,26.05 132.455,27.504 120.2,27.8 121.3,27.8 125.9,27.8 127,27.8 132.473,28.173 90.725,28.475 123.05,28.525 124.15,28.525 132.443,28.759 120.2,28.9 121.3,28.9 125.9,28.9 127,28.9 132.402,29.322 89.55,29.625 123.05,29.625 124.15,29.625 116.6,30.3 86.108,31.159 89.4,33.675 70.575,33.875 59.498,36.525 62.375,37.825 66.9,37.975 52.25,39.85 57.025,40.3 49.275,40.575 54.308,40.584 52.15,41.5 59.525,44.45
  other v4: 11.325,12.975 12.525,12.975 13.725,12.975 11.325,14.175 12.525,14.175 13.725,14.175 11.325,15.375 12.525,15.375 13.725,15.375
GPS_RF1: C12.2 M1.42 | length 11.2
  Top Layer w0.1: M1.42@129.225,21.25 129.231,21.256 131.536,21.256 ccw(c131.536,22.85) 133.13,22.85 133.13,28.131 ; 133.13,28.132 C12.2@133.13,29.195
GPS_RF2: C12.1 C13.2 J2.1 L3.2 L4.1 | length 4.7
  Top Layer w0.2: L4.1@133.105,30.88 L3.2@133.105,32.68 133.105,33.372 C13.2@133.13,33.397 ; C12.1@133.13,29.765 L4.1@133.13,30.855 ; L4.1@133.155,30.88 J2.1@134.205,30.88
GPS_RF3: C13.1 U2.10 | length 4.8
  Top Layer w0.2: C13.1@133.13,33.967 135.167,33.967 ccw(c135.167,34.7) 135.9,34.7 135.9,36.278 U2.10@135.891,36.278
GPS_RF4: L5.1 R4.1 U2.5 | length 3.1
  Top Layer w0.2: R4.1@133,41.1 133,40.375 cw(c132.875,40.375) L5.1@132.875,40.25 cw(c132.875,40.225) 132.9,40.225 132.9,39 ccw(c133.247,39) 133.247,38.653 U2.5@133.603,38.653
GPS_RF5: A2.1 C18.1 R4.2 | length 4
  Top Layer w0.191: A2.1@130.1,43 130.12,43.02 133.075,43.02 133.08,43.02 cw(c133.08,43) 133.1,43 ccw(c133.1,42.9) 133,42.9 R4.2@133,42.1 R4.2@133,42.075
IMCU_LED: Q3.1 U3.AL29 | length 2.8
  Top Layer w0.125: U3.AL29@27.525,25.235 27.578,25.235 28.221,24.592 28.221,23.729 28.625,23.325 Q3.1@28.625,22.95
IMCU_RESET: C41.2 J4.10 R34.1 TP14.1 U3.AC31 | length 14.1
  Top Layer w0.125: U3.AC31@28.125,27.059 28.585,27.059 29.044,26.6 33.225,26.6 J4.10@34.865,24.96 34.45,24.545 v1(34.45,23.525) 33.86,23.525 33.835,23.5 C41.2@33.835,24.1
  Bottom Layer w0.125: v1(34.45,23.525) 36.283,21.692 TP14.1@36.283,20.65
IMCU_SCL: R84.1 U3.AF2 U9.14 | length 17.4
  Top Layer w0.15: v2(11.737,17.932) 11.775,17.894 U9.14@11.775,16.625
  Mid-Layer 1 w0.125: v2(11.737,17.932) 11.75,17.919 11.75,17.5 11.9,17.35 12.4,17.35 14.1,19.05 14.1,20 16.45,22.35 16.45,23.922 16.829,24.301 17.999,24.301 19.611,25.913 21.076,25.913 21.622,26.459 v2(22.125,26.459)
IMCU_SDA: R83.1 U3.AE1 U9.13 | length 16.3
  Top Layer w0.125: v2(20.475,26.775) 20.6,26.65 21.709,26.65 21.712,26.647 U3.AE1@21.725,26.659
  Top Layer w0.15: U9.13@12.275,16.625 12.275,17.872 12.335,17.932 v2(12.337,17.932)
  Mid-Layer 1 w0.125: v2(12.337,17.932) 12.351,17.947 12.351,18.051 13.7,19.4 13.7,20.275 16,22.575 16,24.463 16.6,25.063 18.054,25.063 18.832,25.841 18.832,26.034 19.61,26.813 20.39,26.813 20.428,26.775 v2(20.475,26.775)
IMCU_SWDCLK: J4.4 TP15.1 U3.W31 | length 11.9
  Top Layer w0.125: U3.W31@28.125,27.859 28.144,27.84 28.511,27.84 29.251,27.1 33.35,27.1 34.4,28.15 35.515,28.15 J4.4@36.135,28.77 v1(37.745,28.77)
  Bottom Layer w0.125: TP15.1@36.83,29.529 37.589,28.77 v1(37.745,28.77)
IMCU_SWDIO: J4.2 TP13.1 U3.AA31 | length 10.8
  Top Layer w0.125: U3.AA31@28.125,27.459 28.538,27.459 29.147,26.85 35.515,26.85 J4.2@36.135,26.23 v1(36.945,26.23)
  Bottom Layer w0.125: v1(36.945,26.23) 36.945,24.778 TP13.1@36.957,24.766
"IN 3-4_S4": R32.2 U7_S4.10 | length 2.8
  Top Layer w0.125: U7_S4.10@30.1,38.875 30.1,39.4 30.2,39.5 31.535,39.5 R32.2@32.1,38.935
INT_EXT: R50.1 U5.11 U8_S7.11 | length 4.8
  Top Layer w0.15: U8_S7.11@98.428,32.15 98.799,31.78 v2(99.215,31.78) ; v2(101.118,32.198) 101.47,32.549 ; 101.47,32.55 101.91,32.55 102.31,32.15 U5.11@102.585,32.15
  Mid-Layer 1 w0.15: v2(99.215,31.78) 100.7,31.78 v2(101.118,32.198)
IOEXP_CTRL: R47.2 U3.A17 U7_S5.2 U7_S5.10 U7_S6.2 U7_S6.10 U8_S7.2 | length 102.2
  Top Layer w0.125: U3.A17@25.125,31.659 25.125,31.686 25.175,31.736 25.175,33.934 27.216,35.975 43.5,35.975 v1(43.975,35.5)
  Top Layer w0.152: v2(97.5,32.275) 97.5,30.645 99.28,28.866 99.28,28.761 v2(99.308,28.733) ; v2(98.875,32.25) 98.975,32.15 U8_S7.2@99.825,32.15 ; v2(100.475,33.15) 100.475,35.25 v1(100.225,35.5) 100.785,36.06 R47.2@100.825,36.06 100.875,36.11 v2(100.875,36.55) ; v2(101.966,27.684) U7_S6.10@102.585,27.684 102.997,27.684 103.505,27.176 103.872,27.176 103.979,27.284 U7_S6.2@104.235,27.284 ; v2(102.05,36.55) 102.191,36.409 U7_S5.2@102.585,36.409 102.84,36.409 103.147,36.101 103.517,36.101 103.61,36.009 U7_S5.10@104.235,36.009
  Mid-Layer 1 w0.152: v2(97.5,32.275) v2@98.85,32.275 ; v2@98.864,32.239 v2(98.875,32.25) v2@98.85,32.275 ; v2(99.308,28.733) 100.357,27.684 v2(101.966,27.684) ; v2(100.475,33.15) 99.053,33.15 98.799,32.895 98.799,32.326 v2@98.85,32.275 ; v2(100.875,36.55) v2(102.05,36.55)
  Bottom Layer w0.125: v1(43.975,35.5) 44.233,35.759 59.392,35.759 60.575,34.575 69.225,34.575 70.408,35.759 86.423,35.759 86.819,35.362 87.263,35.362 87.909,36.009 99.717,36.009 v1(100.225,35.5)
LED1: Q4.2 R43.2 U7_S5.16 | length 28
  Top Layer w0.15: U7_S5.16@102.81,37.434 102.81,39.093 104.81,41.093 104.81,51.929 102.72,54.018 102.72,55.707 103.714,56.7 106.25,56.7 107.149,57.599 107.149,59.657 107.392,59.9 107.65,59.9 Q4.2@107.75,60
LED1_EXT: U5.7 U7_S5.15 | length 4.4
  Top Layer w0.15: U5.7@103.21,33.575 v2(103.21,34.086) ; U7_S5.15@103.21,37.434 103.21,37.125 103.535,36.8 v2(103.61,36.8)
  Mid-Layer 1 w0.15: v2(103.21,34.086) 103.76,34.636 103.76,36.65 v2(103.61,36.8)
LED2: Q4.5 R44.2 U7_S5.4 | length 31.9
  Top Layer w0.15: U7_S5.4@102.585,35.609 101.931,35.609 101.685,35.855 101.685,38.746 104.26,41.321 104.26,46.907 103.9,47.267 103.9,49 104.475,49.575 104.475,51.875 102.125,54.225 102.125,56.014 103.311,57.2 106.361,57.2 106.851,57.69 106.851,59.804 106.655,60 106.25,60 Q4.5@106.349,59.901
LED2_EXT: U5.8 U7_S5.3 | length 3.3
  Top Layer w0.15: v2(102.035,36) 102.044,36.009 U7_S5.3@102.585,36.009 ; v2(102.635,34.05) 102.81,33.875 U5.8@102.81,33.575
  Mid-Layer 1 w0.15: v2(102.035,36) 102.035,34.65 v2(102.635,34.05)
LED3: Q5.2 R45.2 U7_S5.8 | length 22.1
  Top Layer w0.15: U7_S5.8@104.01,34.984 104.459,34.984 106.704,37.229 106.704,44.821 106.402,45.123 106.402,51.802 107.149,52.549 107.149,54.554 107.345,54.75 Q5.2@107.75,54.75
LED3_EXT: U5.9 U7_S5.7 | length 3.3
  Top Layer w0.15: U5.9@102.585,32.95 102.201,33.333 102.201,34.192 102.469,34.459 103.344,34.459 103.61,34.725 U7_S5.7@103.61,34.984
LED4: Q5.5 R46.2 U7_S5.12 | length 20.2
  Top Layer w0.15: U7_S5.12@104.235,36.809 104.684,36.809 106.154,38.279 106.154,43.912 105.802,44.264 105.802,44.328 105.801,44.329 105.801,44.801 106.125,45.125 106.125,51.917 106.851,52.644 106.851,54.554 106.655,54.75 106.25,54.75 Q5.5@106.349,54.651
LED4_EXT: U5.10 U7_S5.11 | length 5.9
  Top Layer w0.15: v2(102.41,34.925) 101.91,34.425 101.91,32.972 102.331,32.55 U5.10@102.585,32.55 ; v2(103.26,36.5) 103.351,36.409 U7_S5.11@104.235,36.409
  Mid-Layer 1 w0.15: v2(102.41,34.925) 102.41,35.65 v2(103.26,36.5)
LTE_RF1: J1.1 M1.35 | length 8.7
  Top Layer w0.1: M1.35@125.85,20.375 125.85,19.703 ccw(c126.703,19.703) 126.1,19.1 ccw(c127.066,20.066) 127.066,18.7 J1.1@133.394,18.7
MAGPIO0: M1.21 P24.9 P27.9 | length 42.8
  Top Layer w0.15: v1(93.028,43.181) 94.294,43.181 95.25,42.225 95.25,39.85 96.364,38.736 96.369,38.736 96.505,38.6 v1(96.6,38.6) ; v1(118.387,19.75) 118.442,19.805 118.705,19.805 118.884,19.984 118.884,20.341 M1.21@118.85,20.375
  Bottom Layer w0.15: v1(96.6,38.6) 99.339,38.6 99.589,38.35 102.539,38.35 103.205,39.017 107.089,39.017 111.53,34.575 111.536,34.575 111.8,34.311 111.8,34.305 118.563,27.543 118.563,20.02 118.387,19.845 v1(118.387,19.75)
MAGPIO1: M1.22 P24.10 P27.10 | length 39.9
  Top Layer w0.15: v1(97.473,43.181) 98.744,43.181 99.775,42.15 v1(99.775,38.8) ; v1(118.883,19.317) 119.35,19.785 M1.22@119.35,20.375
  Bottom Layer w0.15: v1(99.775,38.8) 102.6,38.8 103.091,39.292 107.497,39.292 118.883,27.906 v1(118.883,19.317)
MAGPIO2: M1.23 P24.11 P27.11 | length 42
  Top Layer w0.15: v1(119.444,19.042) 119.85,19.448 M1.23@119.85,20.375
  Bottom Layer w0.15: P27.11@93.028,40.641 94.298,40.641 95.389,39.55 101.492,39.55 101.508,39.567 107.611,39.567 119.275,27.903 119.275,21.586 119.444,21.417 v1(119.444,19.042)
  other v1: 94,40.75
MIPI_SCLK: M1.28 P24.6 P27.6 | length 44.2
  Top Layer w0.15: v1(97.473,48.261) 98.739,48.261 100.96,46.04 100.96,40.752 100.789,40.582 v1(100.789,40.489) ; v1(121.6,21.478) 121.6,21.466 121.929,21.136 122.275,20.79 122.275,20.45 M1.28@122.35,20.375
  Bottom Layer w0.15: v1(100.789,40.489) 100.803,40.475 107.481,40.475 119.85,28.106 119.85,21.789 120.614,21.025 121.147,21.025 v1(121.6,21.478)
MIPI_SDATA: M1.27 P24.5 P27.5 | length 47.2
  Top Layer w0.15: v1(93.028,48.261) 94.289,48.261 95.55,47 99.611,47 100.5,46.111 v1(100.5,41.05) ; v1(120.8,21.475) 120.848,21.427 120.848,21.152 121.2,20.8 121.687,20.8 121.775,20.712 121.775,20.45 M1.27@121.85,20.375
  Bottom Layer w0.15: v1(100.5,41.05) 102.464,41.05 102.764,40.75 107.595,40.75 120.125,28.22 120.125,22.15 v1(120.8,21.475)
MIPI_VIO: M1.29 P24.7 P27.7 | length 47
  Top Layer w0.15: v1(93.028,45.721) 94.304,45.721 95.575,44.45 99.45,44.45 100.05,43.85 100.05,40.386 100.4,40.036 v1(100.4,40) ; v1(122.3,21.5) 122.367,21.433 122.367,21.1 122.775,20.692 122.775,20.45 M1.29@122.85,20.375
  Bottom Layer w0.15: v1(100.4,40) 107.567,40 119.55,28.017 119.55,21.7 120.5,20.75 121.55,20.75 v1(122.3,21.5)
NC.CH1_S3: R22.2 U7_S3.1 | length 1.4
  Top Layer w0.15: U7_S3.1@17.425,26.85 18.624,26.85 R22.2@18.79,26.684
NC.CH1_S4: U7_S4.1
NC.CH1_S7: U8_S7.1